# Altium PCB SODIMM_6760X3000_200PIN_2V5_MO-224CA.PCBDOC
Units mm, origin at the board's own origin, x right, y up, seen from the top; angles counter-clockwise.
Board outline 67.6 x 30 mm, 6 copper layers (TopLayer, InternalPlane1_GND, MidLayer1, MidLayer2, InternalPlane2_Voltage, BottomLayer), stack 0.942 mm thick; 1 components, 131 nets, 202 pads, 0 vias.
Unrouted connection lines stored in the file: 69.
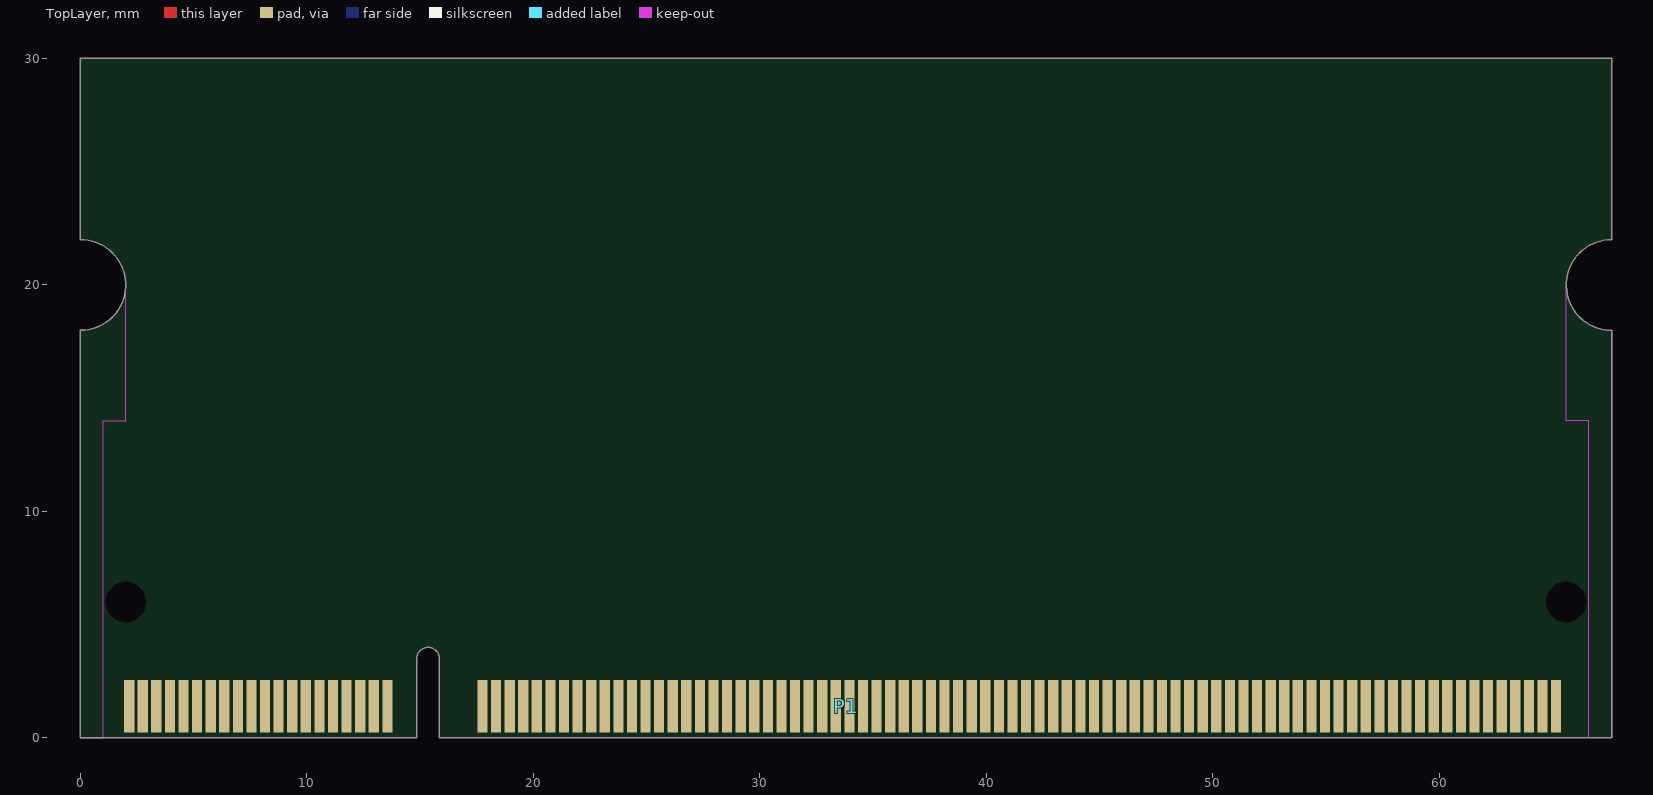
[diagram p0: TopLayer view]
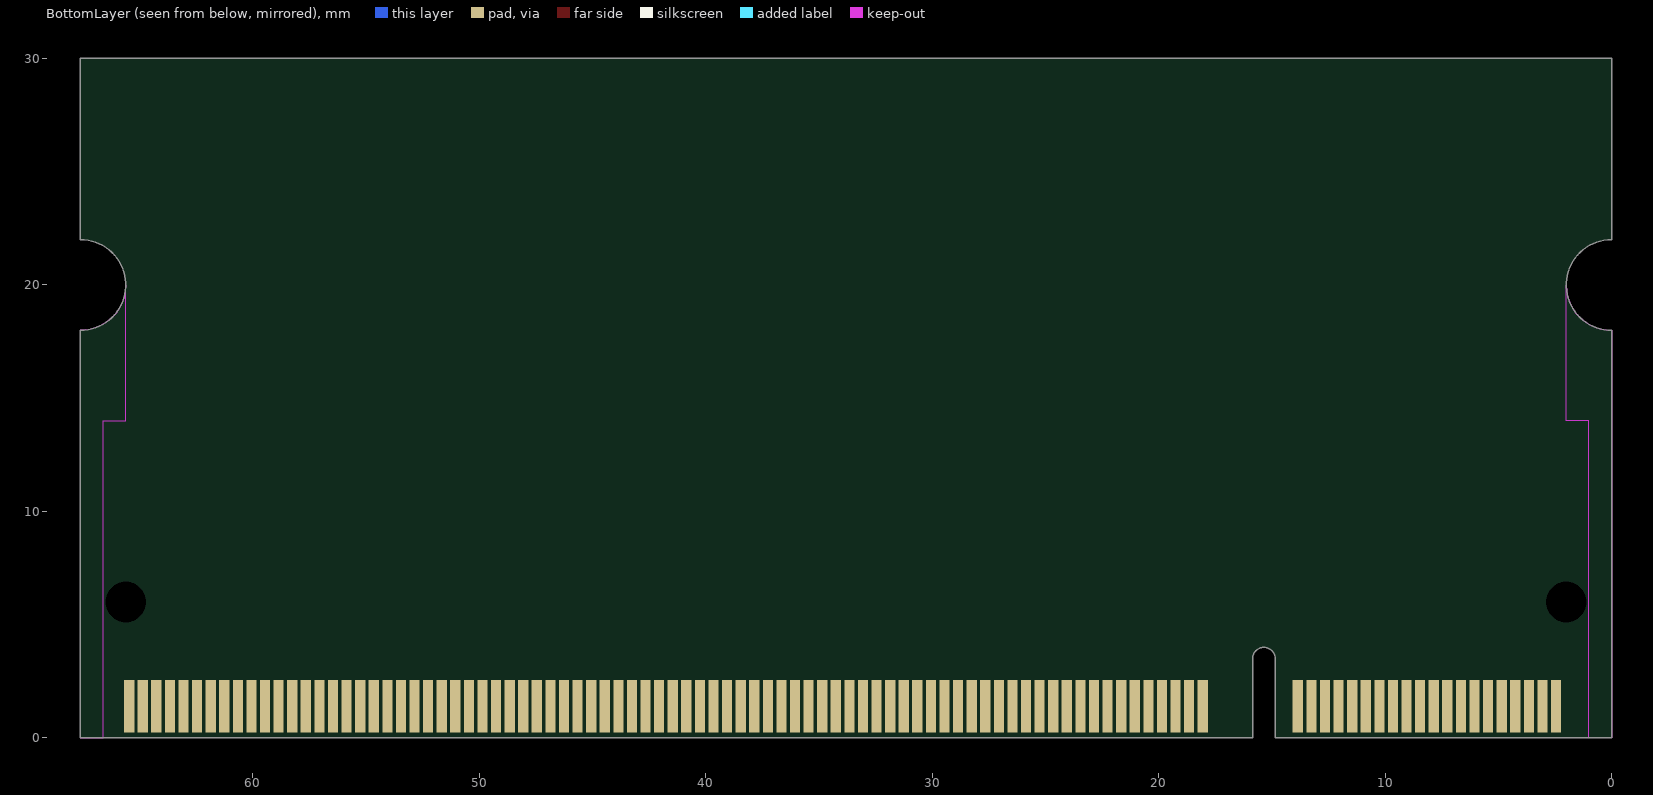
[diagram p1: BottomLayer view, seen from below]
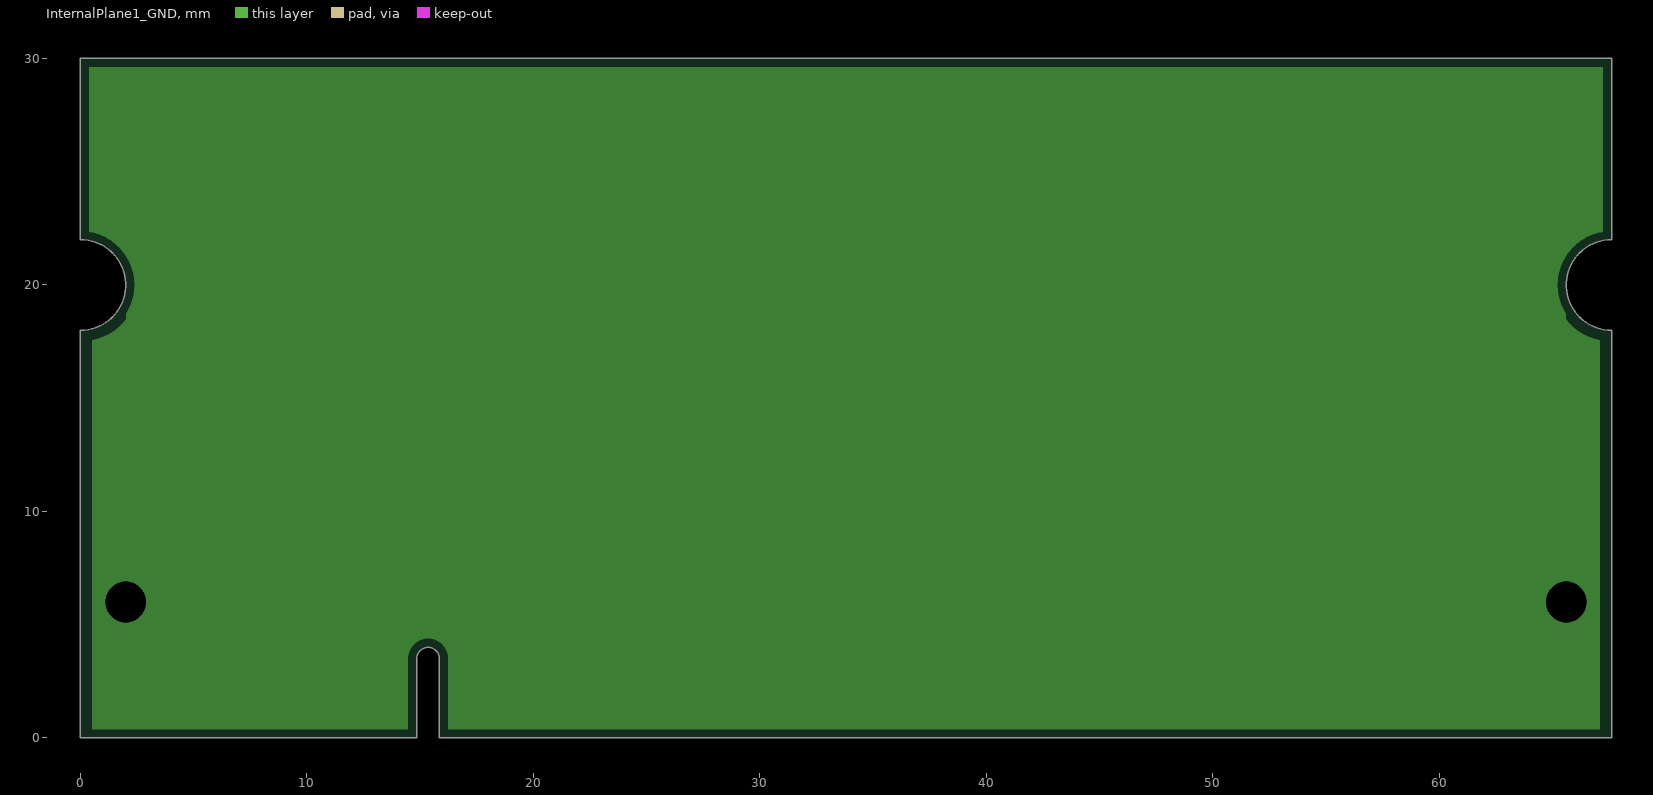
[diagram p2: InternalPlane1_GND, clearances drawn from the general rule]
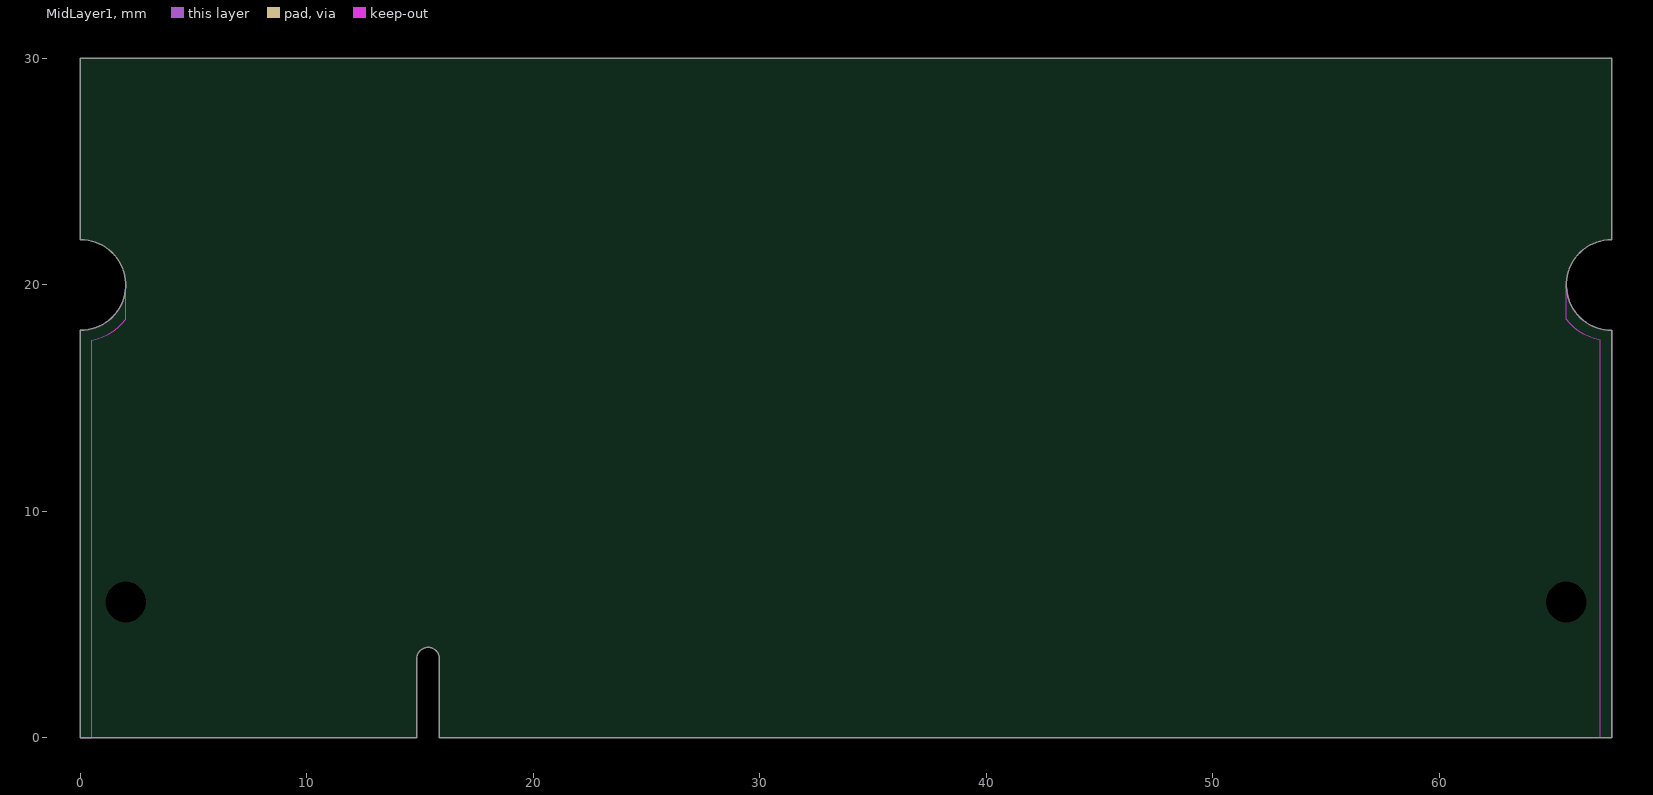
[diagram p3: MidLayer1]
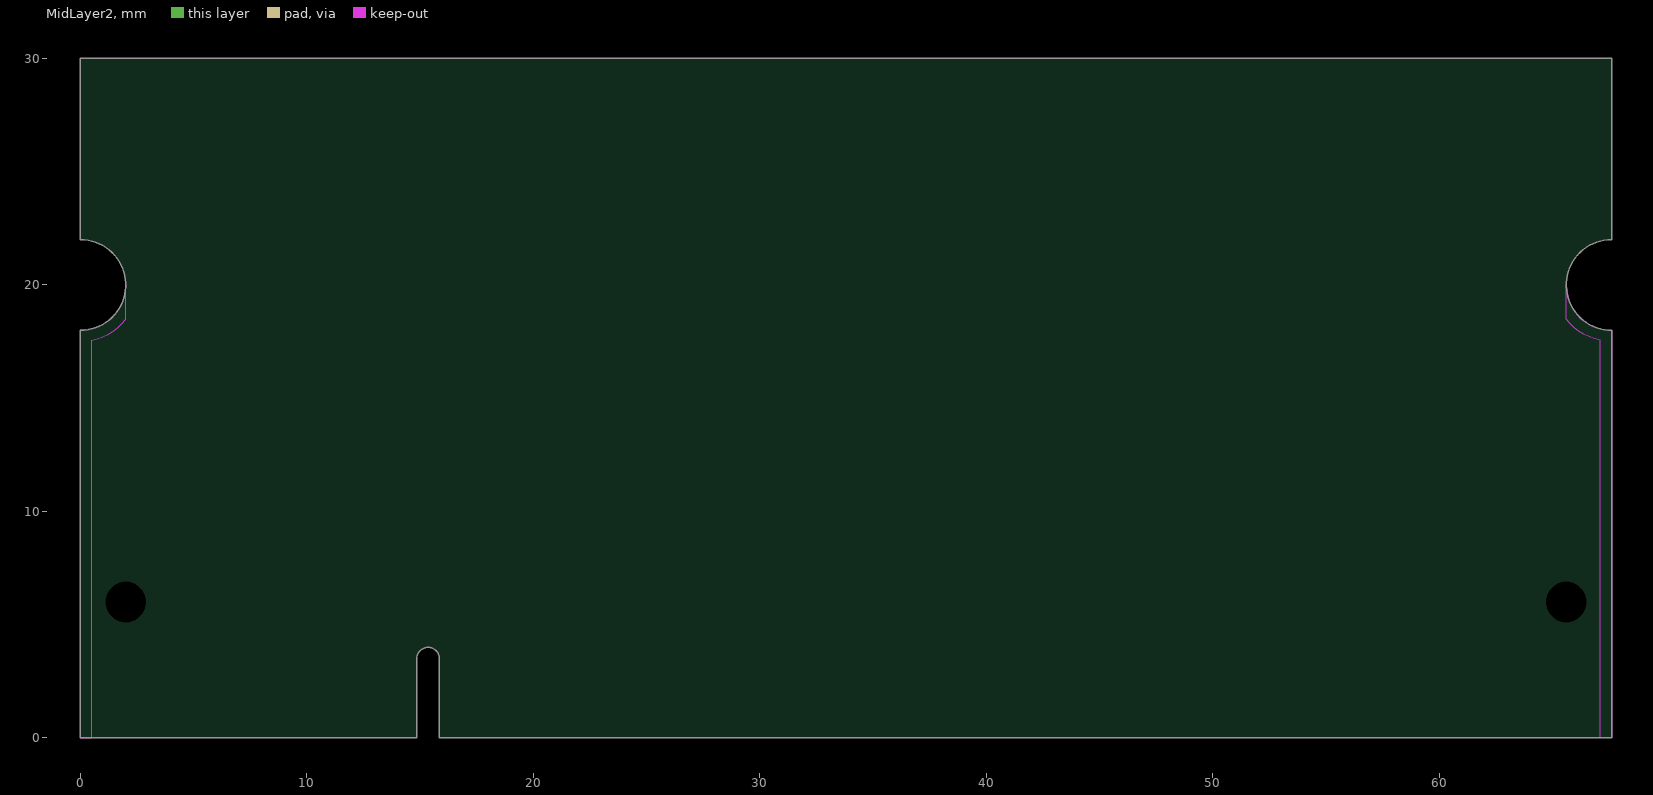
[diagram p4: MidLayer2]
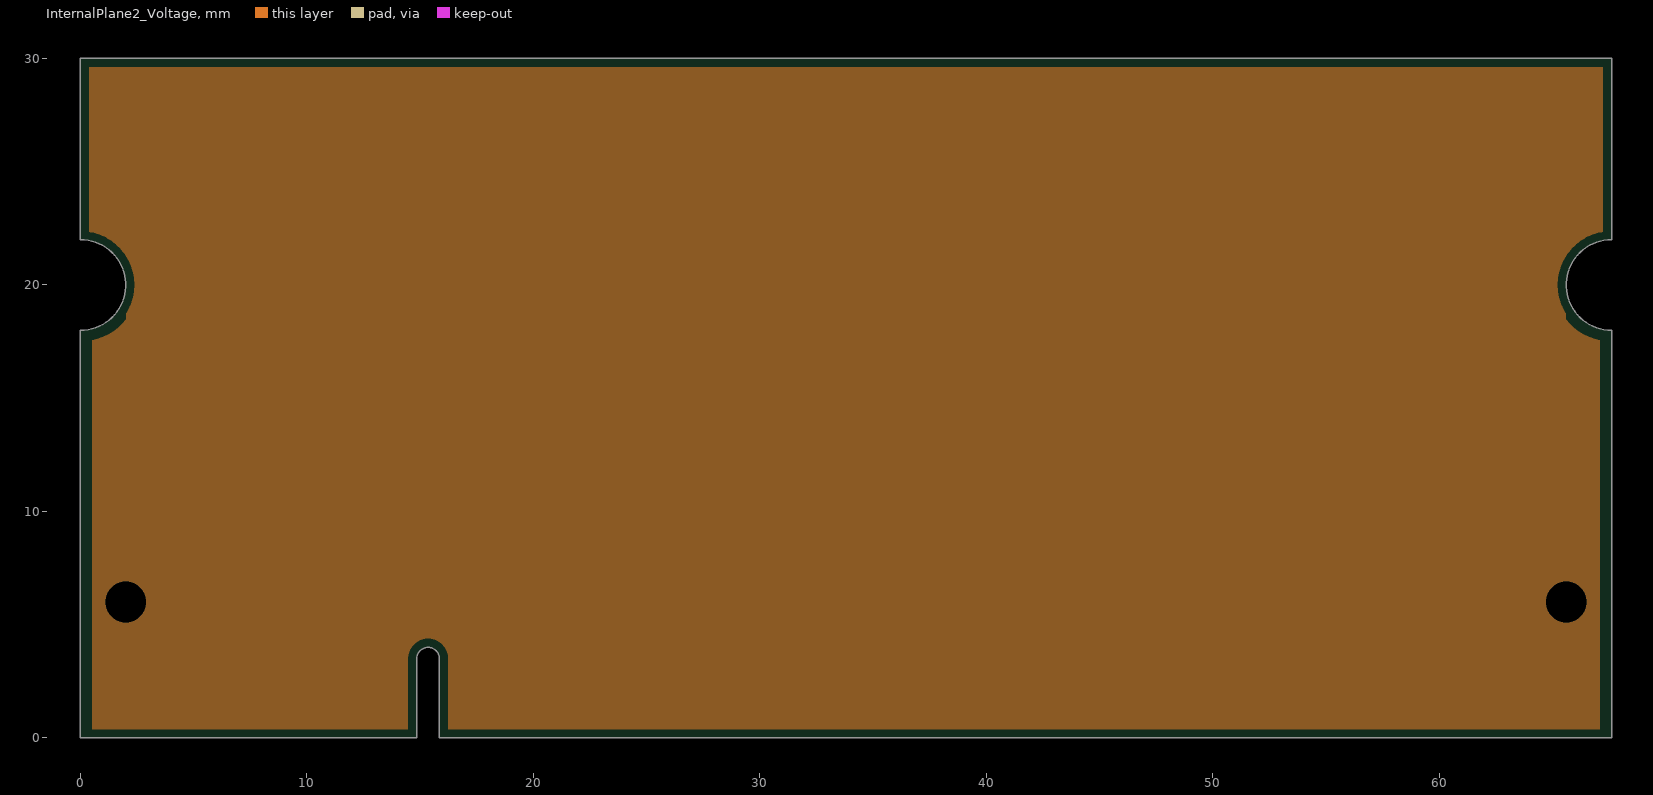
[diagram p5: InternalPlane2_Voltage, clearances drawn from the general rule]

## Layer stack, top to bottom
TopLayer: signal copper 0.0178
Dielectric: core 0.1016, FR-4, Dk 4.8
InternalPlane1_GND: plane copper 0.0356
Dielectric: prepreg 0.127, FR-4, Dk 4.8
MidLayer1: signal copper 0.0178
Dielectric: core 0.3429, FR-4, Dk 4.8
MidLayer2: signal copper 0.0178
Dielectric: prepreg 0.127, FR-4, Dk 4.8
InternalPlane2_Voltage: plane copper 0.0356
Dielectric: core 0.1016, FR-4, Dk 4.8
BottomLayer: signal copper 0.0178

## Board outline
0,0 0,18 ccw(c0,20) 0,22 0,30 67.6,30 67.6,22 ccw(c67.6,20) 67.6,18 67.6,0 15.85,0 15.85,3.5 ccw(c15.35,3.5) 14.85,3.5 14.85,0

## Design rules (kind name [scope] priority, off if disabled: settings)
Clearance Clearance_EdgeConnector [InComponentClass('Edge Connector') vs InComponentClass('Edge Connector')] p1: gap=0.15
Clearance [All] p2: gap=0.254
FabricationTestPointUsage TestPointUsage [All] p1: valid=0 allowmultiple=FALSE
FabricationTestpoint Testpoint [All] p1: side=3 testpointundercomponent=TRUE minsize=1.016 maxsize=2.54 preferedsize=1.524 minholesize=0.508 maxholesize=1.016 preferedholesize=0.813 testpointgrid=0.025 allowsidetop=TRUE allowsidebottom=TRUE usegrid=TRUE gridtolerance=0
Height "MO-224 Page 3, \"Component Height Constraint\"" [TouchesRoom('JEDEC Component Area Front') Or TouchesRoom('JEDEC Component Area Back')] p1: minheight=0 maxheight=1.4 prefheight=1.4
PlaneClearance [All] p1: clearance=0
PlaneConnect [All] p1: planeconnectstyle=Relief reliefexpansion=0.508 reliefentries=4 reliefconductorwidth=0.254 reliefairgap=0.254
PolygonConnect [All] p1: connectstyle=Relief reliefconductorwidth=0.254 reliefentries=4 polygonreliefangle="90 Angle"
RoomDefinition "Edge Connector" [InComponentClass('Edge Connector')] p1: confinementstyle=ConfineIn formatcopy=TRUE lockcomponents=FALSE outline 1.371,-0.304 1.371,3.104 66.229,3.104 66.229,-0.304
RoomDefinition "JEDEC Component Area Back" [Not InComponentClass('Edge Connector')] p2: confinementstyle=ConfineIn formatcopy=TRUE lockcomponents=FALSE outline 2,25.4 2,22.242 2.256,21.986 cw(c0.46,20.19) 3,20.19 3,4 13.55,4 13.55,4.2 17.55,4.2 17.55,4 64.6,4 64.6,20 64.602,20 64.602,20.179 cw(c67.142,20.179) 65.346,21.975 65.6,22.229 65.6,25.4 // Approximate
RoomDefinition "JEDEC Component Area Front" [Not InComponentClass('Edge Connector')] p3: confinementstyle=ConfineIn formatcopy=TRUE lockcomponents=FALSE outline 65.6,25.4 65.6,22.229 65.346,21.975 ccw(c67.142,20.179) 64.602,20.179 64.602,4.002 64.6,4 17.55,4.089 17.55,4.2 13.614,4.2 13.55,4 3,4 3,20.495 ccw(c2.972,20.495) 2.972,20.523 cw(c2.972,20.495) 3,20.495 3,20 2.972,20.65 2.337,22.022 2,22.242 2,25.4 // Approximate
RoutingVias [All] p1: holewidth=0.711 width=1.27 viastyle="Through Hole" minholewidth=0.711 minwidth=1.27 maxholewidth=0.711 maxwidth=1.27
SilkscreenOverComponentPads [All] p1: minsilkscreentomaskgap=0.254
SolderMaskExpansion [All] p1: expansion=0.102
Width [All] p1: maxlimit=0.254 minlimit=0.254 preferedwidth=0.254
22 further rules are at their usual default settings.

## Classes and differential pairs
net class SA[0..2]: SA0 SA1 SA2
net class DQS[0..8]: DQS0 DQS1 DQS2 DQS3 DQS4 DQS5 DQS6 DQS7 DQS8
net class CK[0..2]: CK0 CK1 CK2
net class DQ[0..63]: DQ0 DQ1 DQ2 DQ3 DQ4 DQ5 DQ6 DQ7 DQ8 DQ9 DQ10 DQ11 DQ12 DQ13 DQ14 DQ15 DQ16 DQ17 DQ18 DQ19 DQ20 DQ21 DQ22 DQ23 DQ24 DQ25 DQ26 DQ27 DQ28 DQ29 DQ30 DQ31 DQ32 DQ33 DQ34 DQ35 DQ36 DQ37 DQ38 DQ39 DQ40 DQ41 DQ42 DQ43 DQ44 DQ45 DQ46 DQ47 DQ48 DQ49 DQ50 DQ51 DQ52 DQ53 DQ54 DQ55 DQ56 DQ57 DQ58 DQ59 DQ60 DQ61 DQ62 DQ63
net class CB[0..7]: CB0 CB1 CB2 CB3 CB4 CB5 CB6 CB7
net class A[0..12]: A0 A1 A2 A3 A4 A5 A6 A7 A8 A9 A11 A12
net class BA[0..1]: BA0 BA1
net class CKE[0..1]: CKE0 CKE1
net class DM[0..8]: DM0 DM1 DM2 DM3 DM4 DM5 DM6 DM7 DM8
net class C\K\[0..2]: C\K\0 C\K\1 C\K\2
net class S\[0..1]: S\0 S\1

## Components (designator, comment, footprint, x,y, rotation, side; value= is the part's Value field where it differs from the comment)
P1 "SODIMM-CN-2P-M-R200" SODIMM-GF-2D-600-1K-S200 2.15,1.4 r0 top locked

## Footprints (in the part's own frame and the unit in brackets; to place one, negate y for a bottom-side part, rotate by r counter-clockwise, add the part's x,y. Pads: shape width x height; smd on the part's side, far side on the other; paste and mask are expansions set on the pad)
SODIMM-GF-2D-600-1K-S200 [mm] "Golden finger, SODIMM, Dual, Staggered, Pitch 0.6mm, 200-Position"
  rect 0.45x2.3 smd paste+0.3 mask+0.3: 1(0,0) 3(0.6,0) 5(1.2,0) 7(1.8,0) 9(2.4,0) 11(3,0) 13(3.6,0) 15(4.2,0) 17(4.8,0) 19(5.4,0) 21(6,0) 23(6.6,0) 25(7.2,0) 27(7.8,0) 29(8.4,0) 31(9,0) 33(9.6,0) 35(10.2,0) 37(10.8,0) 39(11.4,0) 41(15.6,0) 43(16.2,0) 45(16.8,0) 47(17.4,0) 49(18,0) 51(18.6,0) 53(19.2,0) 55(19.8,0) 57(20.4,0) 59(21,0) 61(21.6,0) 63(22.2,0) 65(22.8,0) 67(23.4,0) 69(24,0) 71(24.6,0) 73(25.2,0) 75(25.8,0) 77(26.4,0) 79(27,0) 81(27.6,0) 83(28.2,0) 85(28.8,0) 87(29.4,0) 89(30,0) 91(30.6,0) 93(31.2,0) 95(31.8,0) 97(32.4,0) 99(33,0) 101(33.6,0) 103(34.2,0) 105(34.8,0) 107(35.4,0) 109(36,0) 111(36.6,0) 113(37.2,0) 115(37.8,0) 117(38.4,0) 119(39,0) 121(39.6,0) 123(40.2,0) 125(40.8,0) 127(41.4,0) 129(42,0) 131(42.6,0) 133(43.2,0) 135(43.8,0) 137(44.4,0) 139(45,0) 141(45.6,0) 143(46.2,0) 145(46.8,0) 147(47.4,0) 149(48,0) 151(48.6,0) 153(49.2,0) 155(49.8,0) 157(50.4,0) 159(51,0) 161(51.6,0) 163(52.2,0) 165(52.8,0) 167(53.4,0) 169(54,0) 171(54.6,0) 173(55.2,0) 175(55.8,0) 177(56.4,0) 179(57,0) 181(57.6,0) 183(58.2,0) 185(58.8,0) 187(59.4,0) 189(60,0) 191(60.6,0) 193(61.2,0) 195(61.8,0) 197(62.4,0) 199(63,0)
  rect 0.45x2.3 smd far side paste+0.3 mask+0.3: 2(0.3,0) 4(0.9,0) 6(1.5,0) 8(2.1,0) 10(2.7,0) 12(3.3,0) 14(3.9,0) 16(4.5,0) 18(5.1,0) 20(5.7,0) 22(6.3,0) 24(6.9,0) 26(7.5,0) 28(8.1,0) 30(8.7,0) 32(9.3,0) 34(9.9,0) 36(10.5,0) 38(11.1,0) 40(11.7,0) 42(15.9,0) 44(16.5,0) 46(17.1,0) 48(17.7,0) 50(18.3,0) 52(18.9,0) 54(19.5,0) 56(20.1,0) 58(20.7,0) 60(21.3,0) 62(21.9,0) 64(22.5,0) 66(23.1,0) 68(23.7,0) 70(24.3,0) 72(24.9,0) 74(25.5,0) 76(26.1,0) 78(26.7,0) 80(27.3,0) 82(27.9,0) 84(28.5,0) 86(29.1,0) 88(29.7,0) 90(30.3,0) 92(30.9,0) 94(31.5,0) 96(32.1,0) 98(32.7,0) 100(33.3,0) 102(33.9,0) 104(34.5,0) 106(35.1,0) 108(35.7,0) 110(36.3,0) 112(36.9,0) 114(37.5,0) 116(38.1,0) 118(38.7,0) 120(39.3,0) 122(39.9,0) 124(40.5,0) 126(41.1,0) 128(41.7,0) 130(42.3,0) 132(42.9,0) 134(43.5,0) 136(44.1,0) 138(44.7,0) 140(45.3,0) 142(45.9,0) 144(46.5,0) 146(47.1,0) 148(47.7,0) 150(48.3,0) 152(48.9,0) 154(49.5,0) 156(50.1,0) 158(50.7,0) 160(51.3,0) 162(51.9,0) 164(52.5,0) 166(53.1,0) 168(53.7,0) 170(54.3,0) 172(54.9,0) 174(55.5,0) 176(56.1,0) 178(56.7,0) 180(57.3,0) 182(57.9,0) 184(58.5,0) 186(59.1,0) 188(59.7,0) 190(60.3,0) 192(60.9,0) 194(61.5,0) 196(62.1,0) 198(62.7,0) 200(63.3,0)

## Part data
P1: library part CMP-0001-00060-1, "Golden finger, SODIMM, Dual, Staggered, Pitch 0.6mm, 200-Position"

## Free pads (board coordinates)
  round 1.5 hole 1.8 unplated: MH1(2,6) MH2(65.6,6)

## Nets (pads, with @x,y where several pads share a name; then routed paths per layer and width w, separated by ;. In a path a pad name is that pad's centre, name@x,y a point inside that pad or via, vN(x,y) a via of type N, cw(c..) or ccw(c..) an arc to the next point about the centre after c; other vN are vias at no path point)
A0: P1.112
A1: P1.111
A2: P1.110
A3: P1.109
A4: P1.108
A5: P1.107
A6: P1.106
A7: P1.105
A8: P1.102
A9: P1.101
A10/AP: P1.115
A11: P1.100
A12: P1.99
BA0: P1.117
BA1: P1.116
C\K\0: P1.37
C\K\1: P1.158
C\K\2: P1.91
CAS: P1.120
CB0: P1.71
CB1: P1.73
CB2: P1.79
CB3: P1.83
CB4: P1.72
CB5: P1.74
CB6: P1.80
CB7: P1.84
CK0: P1.35
CK1: P1.160
CK2: P1.89
CKE0: P1.96
CKE1: P1.95
DM0: P1.12
DM1: P1.26
DM2: P1.48
DM3: P1.62
DM4: P1.134
DM5: P1.148
DM6: P1.170
DM7: P1.184
DM8: P1.78
DQ0: P1.5
DQ1: P1.7
DQ2: P1.13
DQ3: P1.17
DQ4: P1.6
DQ5: P1.8
DQ6: P1.14
DQ7: P1.18
DQ8: P1.19
DQ9: P1.23
DQ10: P1.29
DQ11: P1.31
DQ12: P1.20
DQ13: P1.24
DQ14: P1.30
DQ15: P1.32
DQ16: P1.41
DQ17: P1.43
DQ18: P1.49
DQ19: P1.53
DQ20: P1.42
DQ21: P1.44
DQ22: P1.50
DQ23: P1.54
DQ24: P1.55
DQ25: P1.59
DQ26: P1.65
DQ27: P1.67
DQ28: P1.56
DQ29: P1.60
DQ30: P1.66
DQ31: P1.68
DQ32: P1.127
DQ33: P1.129
DQ34: P1.135
DQ35: P1.139
DQ36: P1.128
DQ37: P1.130
DQ38: P1.136
DQ39: P1.140
DQ40: P1.141
DQ41: P1.145
DQ42: P1.151
DQ43: P1.153
DQ44: P1.142
DQ45: P1.146
DQ46: P1.152
DQ47: P1.154
DQ48: P1.163
DQ49: P1.165
DQ50: P1.171
DQ51: P1.175
DQ52: P1.164
DQ53: P1.166
DQ54: P1.172
DQ55: P1.176
DQ56: P1.177
DQ57: P1.181
DQ58: P1.187
DQ59: P1.189
DQ60: P1.178
DQ61: P1.182
DQ62: P1.188
DQ63: P1.190
DQS0: P1.11
DQS1: P1.25
DQS2: P1.47
DQS3: P1.61
DQS4: P1.133
DQS5: P1.147
DQS6: P1.169
DQS7: P1.183
DQS8: P1.77
DU: P1.85 P1.97 P1.98 P1.124 P1.200
DU(A13): P1.123
DU(RESET): P1.86
RAS: P1.118
S\0: P1.121
S\1: P1.122
SA0: P1.194
SA1: P1.196
SA2: P1.198
SCL: P1.195
SDA: P1.193
VDD: P1.9 P1.10 P1.21 P1.22 P1.33 P1.34 P1.36 P1.45 P1.46 P1.57 P1.58 P1.69 P1.70 P1.81 P1.82 P1.92 P1.93 P1.94 P1.113 P1.114 P1.131 P1.132 P1.143 P1.144 P1.155 P1.156 P1.157 P1.167 P1.168 P1.179 P1.180 P1.191 P1.192
VDDID: P1.199
VDDSPD: P1.197
VREF: P1.1 P1.2
VSS: P1.3 P1.4 P1.15 P1.16 P1.27 P1.28 P1.38 P1.39 P1.40 P1.51 P1.52 P1.63 P1.64 P1.75 P1.76 P1.87 P1.88 P1.90 P1.103 P1.104 P1.125 P1.126 P1.137 P1.138 P1.149 P1.150 P1.159 P1.161 P1.162 P1.173 P1.174 P1.185 P1.186
WE: P1.119

## Polygon pours and split planes (outlines as drawn)
no net on InternalPlane1_GND (split plane): 67.217,22.351 67.186,22.347 66.983,22.302 66.785,22.24 66.593,22.16 66.408,22.064 66.233,21.952 66.068,21.826 65.915,21.685 65.774,21.532 65.648,21.367 65.536,21.192 65.44,21.007 65.36,20.815 65.298,20.617 65.253,20.414 65.226,20.208 65.217,20 65.226,19.792 65.253,19.586 65.298,19.383 65.36,19.185 65.44,18.993 65.536,18.808 65.599,18.71 65.6,18.494 65.604,18.494 65.603,18.493 65.824,18.224 66.204,17.911 66.639,17.679 67.098,17.54 67.1,17.547 67.1,0.383 16.233,0.383 16.233,3.5 16.225,3.615 16.203,3.729 16.166,3.838 16.115,3.941 16.05,4.037 15.974,4.124 15.887,4.2 15.791,4.265 15.688,4.316 15.579,4.353 15.465,4.375 15.35,4.383 15.235,4.375 15.121,4.353 15.012,4.316 14.909,4.265 14.813,4.2 14.726,4.124 14.65,4.037 14.585,3.941 14.534,3.838 14.497,3.729 14.475,3.615 14.467,3.5 14.467,0.383 0.5,0.383 0.5,17.547 0.502,17.54 0.961,17.679 1.396,17.911 1.776,18.224 1.997,18.493 1.996,18.494 2,18.494 2.001,18.71 2.064,18.808 2.16,18.993 2.24,19.185 2.302,19.383 2.347,19.586 2.374,19.792 2.383,20 2.374,20.208 2.347,20.414 2.302,20.617 2.24,20.815 2.16,21.007 2.064,21.192 1.952,21.367 1.826,21.532 1.685,21.685 1.532,21.826 1.367,21.952 1.192,22.064 1.007,22.16 0.815,22.24 0.617,22.302 0.414,22.347 0.383,22.351 0.383,29.617 67.217,29.617
no net on InternalPlane2_Voltage (split plane): 67.217,22.351 67.186,22.347 66.983,22.302 66.785,22.24 66.593,22.16 66.408,22.064 66.233,21.952 66.068,21.826 65.915,21.685 65.774,21.532 65.648,21.367 65.536,21.192 65.44,21.007 65.36,20.815 65.298,20.617 65.253,20.414 65.226,20.208 65.217,20 65.226,19.792 65.253,19.586 65.298,19.383 65.36,19.185 65.44,18.993 65.536,18.808 65.599,18.71 65.6,18.494 65.604,18.494 65.603,18.493 65.824,18.224 66.204,17.911 66.639,17.679 67.098,17.54 67.1,17.547 67.1,0.383 16.233,0.383 16.233,3.5 16.225,3.615 16.203,3.729 16.166,3.838 16.115,3.941 16.05,4.037 15.974,4.124 15.887,4.2 15.791,4.265 15.688,4.316 15.579,4.353 15.465,4.375 15.35,4.383 15.235,4.375 15.121,4.353 15.012,4.316 14.909,4.265 14.813,4.2 14.726,4.124 14.65,4.037 14.585,3.941 14.534,3.838 14.497,3.729 14.475,3.615 14.467,3.5 14.467,0.383 0.5,0.383 0.5,17.547 0.502,17.54 0.961,17.679 1.396,17.911 1.776,18.224 1.997,18.493 1.996,18.494 2,18.494 2.001,18.71 2.064,18.808 2.16,18.993 2.24,19.185 2.302,19.383 2.347,19.586 2.374,19.792 2.383,20 2.374,20.208 2.347,20.414 2.302,20.617 2.24,20.815 2.16,21.007 2.064,21.192 1.952,21.367 1.826,21.532 1.685,21.685 1.532,21.826 1.367,21.952 1.192,22.064 1.007,22.16 0.815,22.24 0.617,22.302 0.414,22.347 0.383,22.351 0.383,29.617 67.217,29.617

## Keep-outs
TopLayer:
  region: 65.6,19.987 ccw(c67.572,19.987) 66.178,18.593 66.184,18.587 ccw(c67.6,20.003) 67.6,18 67.6,0 66.6,0 66.6,14 65.6,14
  region: 2,19.987 cw(c0.028,19.987) 1.422,18.593 1.416,18.587 cw(c0,20.003) 0,18 0,0 1,0 1,14 2,14
MidLayer1:
  region: 67.6,0 67.1,0 67.1,17.547 67.101,17.55 cw(c67.6,20) 65.604,18.494 65.6,18.494 65.6,20 ccw(c67.6,20) 67.6,18
  region: 0,0 0.5,0 0.5,17.547 0.499,17.55 ccw(c0,20) 1.996,18.494 2,18.494 2,20 cw(c0,20) 0,18
MidLayer2:
  region: 67.6,0 67.1,0 67.1,17.547 67.101,17.55 cw(c67.6,20) 65.604,18.494 65.6,18.494 65.6,20 ccw(c67.6,20) 67.6,18
  region: 0,0 0.5,0 0.5,17.547 0.499,17.55 ccw(c0,20) 1.996,18.494 2,18.494 2,20 cw(c0,20) 0,18
BottomLayer:
  region: 65.6,19.987 ccw(c67.572,19.987) 66.178,18.593 66.184,18.587 ccw(c67.6,20.003) 67.6,18 67.6,0 66.6,0 66.6,14 65.6,14
  region: 2,19.987 cw(c0.028,19.987) 1.422,18.593 1.416,18.587 cw(c0,20.003) 0,18 0,0 1,0 1,14 2,14

## Other copper
InternalPlane1_GND (plane layer: these items are gaps in the copper):
  region: 0,0 0.5,0 0.5,17.547 0.499,17.55 ccw(c0,20) 1.996,18.494 2,18.494 2,20 cw(c0,20) 0,18
  region: 67.6,0 67.1,0 67.1,17.547 67.101,17.55 cw(c67.6,20) 65.604,18.494 65.6,18.494 65.6,20 ccw(c67.6,20) 67.6,18
InternalPlane2_Voltage (plane layer: these items are gaps in the copper):
  region: 67.6,0 67.1,0 67.1,17.547 67.101,17.55 cw(c67.6,20) 65.604,18.494 65.6,18.494 65.6,20 ccw(c67.6,20) 67.6,18
  region: 0,0 0.5,0 0.5,17.547 0.499,17.55 ccw(c0,20) 1.996,18.494 2,18.494 2,20 cw(c0,20) 0,18

## Silkscreen, mask and mechanical layers (free items; w line width, h text height)
JEDEC Outline:
  the board outline again, w0.2
JEDEC Notes:
  text "- Nominal values used, all dimensions are mm." at 80.75,23.168 h1.52
  text "- MH1 and MH2 are optional holes (200PIN_SODIMM_MO-224E, Page 1)" at 80.75,21.39 h1.52
  text "- Non-metalized areas in 200PIN_SODIMM_MO-224E implemented as keepout / plane region objects." at 80.75,19.612 h1.52
  text "- Component height rule derived from 200PIN_SODIMM_MO-224E, Page 3, \"Component Height Constraint\"." at 80.75,17.834 h1.52
  text "- Pinout nets were derived from PC2700 DDR SDRAM Unbuffered SO-DIMM REFERENCENCE DESIGN SPECIFICATION (SODIMMDesignStand_rev1.PDF)" at 80.75,16.056 h1.52
  text "- Component placement area arcs are approximated." at 80.75,14.278 h1.52
  text "- Stackup and Plane pullback is not specified in 200PIN_SODIMM_MO-224E, nor implemented in this template." at 80.75,12.5 h1.52
JEDEC Component Area (Approx):
  lines w0.2: 1.997,22.239 cw(c0,20) 3,20 3,4 13.55,4 13.55,4.2 17.55,4.2 17.55,4 64.6,4 64.602,20 ; 2,22.242 2,30 65.6,30 65.6,22.229 ; 64.602,19.889 cw(c67.6,20) 65.592,22.229

## Dimensions
0,30 to 67.6,30 on JEDEC Dimensions
67.6,30 to 67.6,0 on JEDEC Dimensions
13.55,1.525 to 15.35,4 on JEDEC Dimensions